# Altium PCB atWork_Motor_Driver.PcbDoc
Units mm, origin at the board's own origin, x right, y up, seen from the top; angles counter-clockwise.
Board outline 145.92 x 74.55 mm, 2 copper layers (Top Layer, Bottom Layer); 39 components, 56 nets, 250 pads, 52 vias.
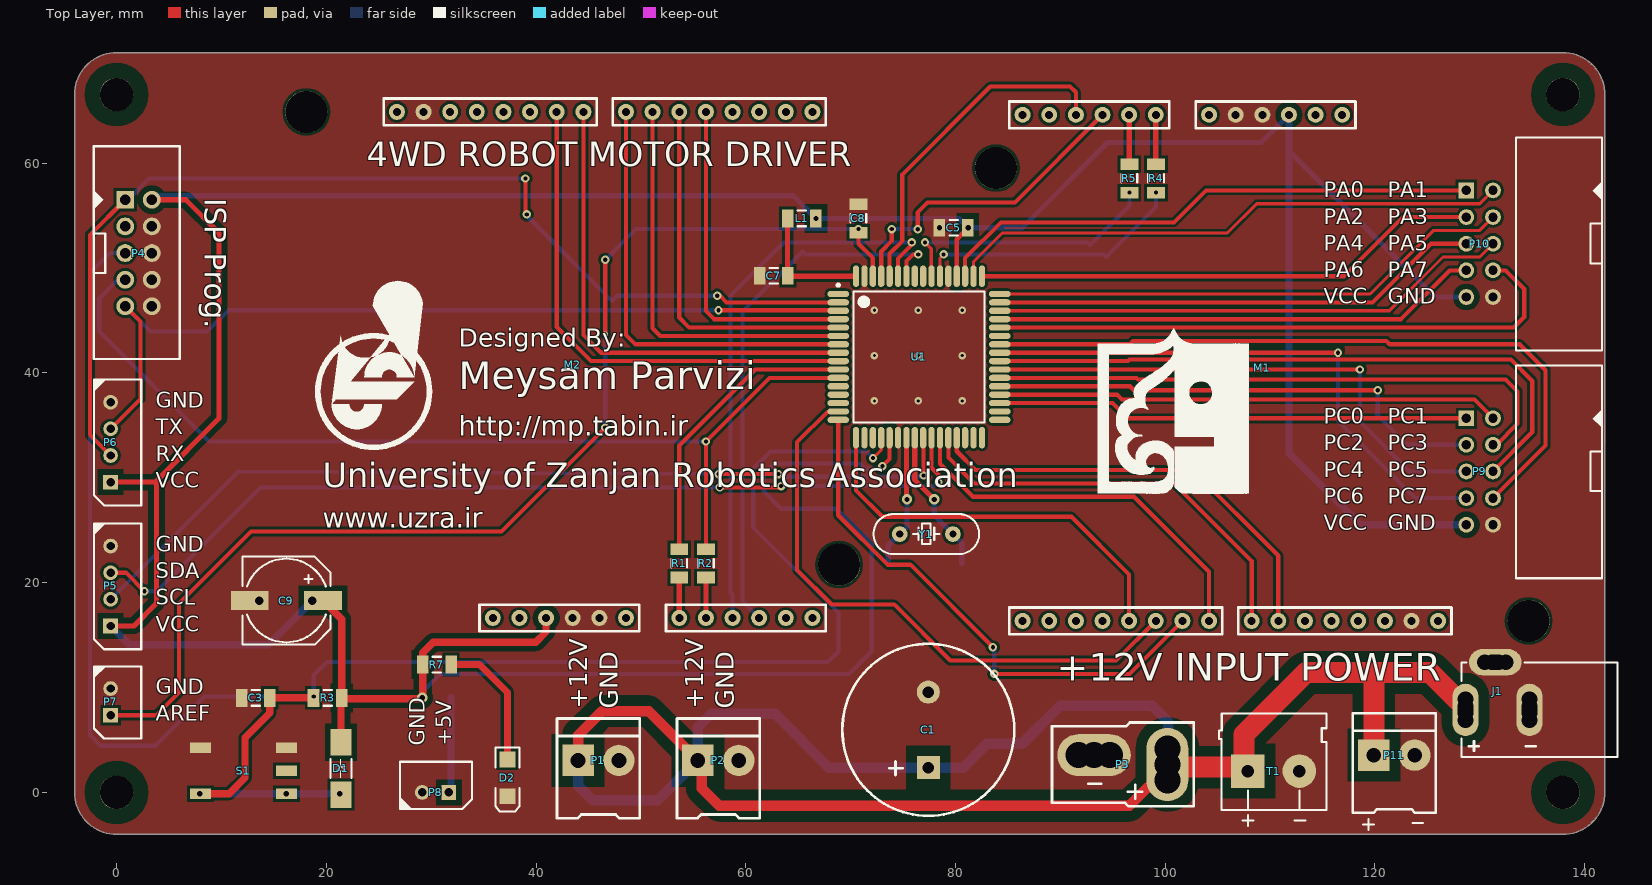
[diagram p0: Top Layer view]
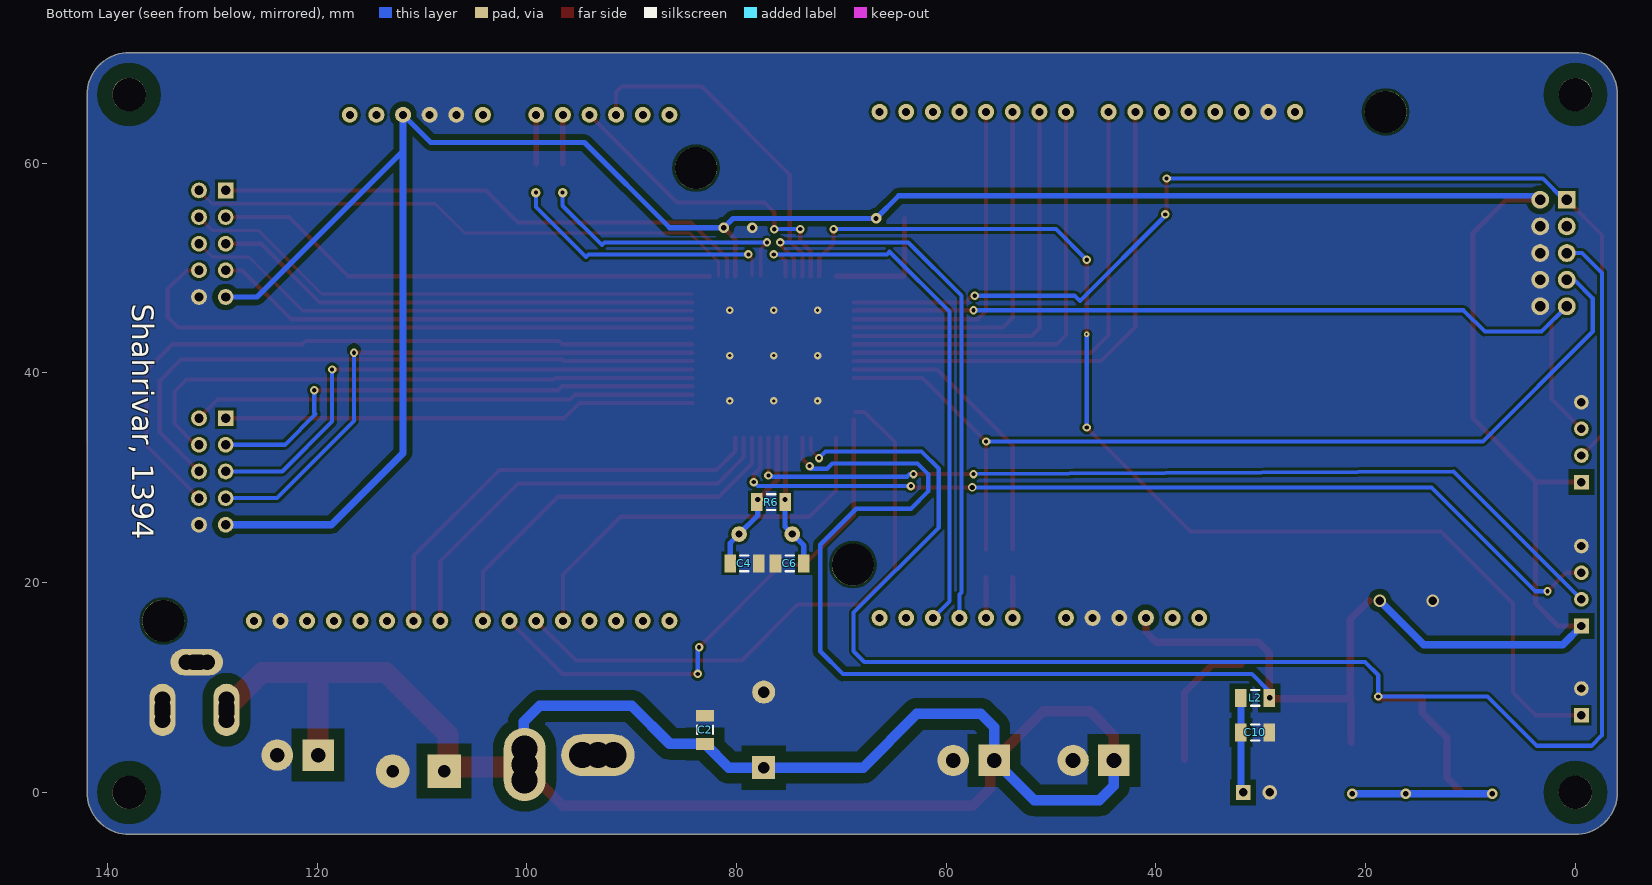
[diagram p1: Bottom Layer view, seen from below]

## Layer stack, top to bottom
Top Solder: solder mask 0.0102, Solder Resist, Dk 3.5
Top Layer: signal copper 0.0356
Dielectric 1: dielectric 0.32, FR-4, Dk 4.8
Bottom Layer: signal copper 0.0356
Bottom Solder: solder mask 0.0102, Solder Resist, Dk 3.5

## Board outline
-4,0 ccw(c0,0) 0,-4 137.923,-4 ccw(c137.923,0) 141.923,0 141.923,66.548 ccw(c137.923,66.548) 137.923,70.548 0,70.548 ccw(c0,66.548) -4,66.548

## Design rules (kind name [scope] priority, off if disabled: settings)
Clearance Clearance_1 [InNet('BATT') vs InNet('GND')] p1: gap=1
Clearance Clearance_2 [InNet('VCC') vs InNet('GND')] p2: gap=0.508
Clearance Clearance_3 [InNet('5V') vs InNet('GND')] p3: gap=0.508
Clearance [All] p4: gap=0.254
PolygonConnect [All] p1: connectstyle=Direct reliefconductorwidth=0.254 reliefentries=4 polygonreliefangle="90 Angle" airgapwidth=0.254
RoutingVias [All] p1: holewidth=0.711 width=1.27 viastyle="Through Hole" minholewidth=0.711 minwidth=1.27 maxholewidth=0.711 maxwidth=1.27
SolderMaskExpansion [All] p1: expansion=0.102
Width [All] p1: maxlimit=2 minlimit=0.254 preferedwidth=0.7 minimp=50.000000 maximp=50.000000 favimp=50.000000
30 further rules are at their usual default settings.

## Components (designator, comment, footprint, x,y, rotation, side; value= is the part's Value field where it differs from the comment)
C1 "Cap Pol1" CAP2 77.407,5.969 r90 top
C2 "Cap" C1206 82.995,5.969 r270 bottom
C3 "Cap" C1206 13.272,9.017 r0 top
C4 "Cap" C1206 79.248,21.844 r0 bottom
C5 "Cap" C1206 79.82,53.848 r0 top
C6 "Cap" C1206 74.93,21.844 r180 bottom
C7 "Cap" C1206 62.675,49.276 r0 top
C8 "Cap" C1206 70.739,54.737 r270 top
C9 "Cap Pol1" CAP-SMD1 16.193,18.288 r0 top
C10 "Cap" C1206 30.544,5.715 r0 bottom
D1 "Diode 1N4007" DIODE-SMD 21.4,2.286 r90 top
D2 "LED2" 3.2X1.6X1.1 37.275,1.397 r270 top
J1 "PWR2.5" PWR2.5 143.129,7.874 r180 top
L1 "Inductor" C1206 65.342,54.737 r0 top
L2 "Inductor" C1206 30.544,9.017 r180 bottom
M1 "MonsterMoto Shield" MONSTERMOTO 134.735,16.434 r180 top
M2 "MonsterMoto Shield" MONSTERMOTO 18.022,64.821 r0 top
P1 "Motor Power" POWER2PIN 44.006,3.048 r0 top
P2 "Motor Power" POWER2PIN 55.436,3.048 r0 top
P3 "XT Power" XT 100.203,2.667 r180 top
P4 "Programmer" BOX2X5 0.826,51.435 r270 top
P5 "I2C" XH4PIN -0.571,15.875 r270 top
P6 "UART" XH4PIN -0.571,29.591 r270 top
P7 "ADC REF" XH2PIN -0.571,7.366 r270 top
P8 "Digital Power" XH2PIN 31.687,0 r0 top
P9 "Box 5X2" BOX2X5_RIGHT 131.255,30.607 r90 top
P10 "Box 5X2" BOX2X5_RIGHT 131.255,52.324 r90 top
P11 "Main Power" POWER2PIN 119.888,3.556 r0 top
R1 "Res1" C1206 53.658,21.844 r270 top
R2 "Res1" C1206 56.198,21.844 r270 top
R3 "Res1" C1206 20.13,9.017 r180 top
R4 "Res1" C1206 99.124,58.547 r90 top
R5 "Res1" C1206 96.584,58.547 r90 top
R6 "Res1" C1206 76.708,27.686 r180 bottom
R7 "Res1" C1206 30.544,12.192 r180 top
S1 "SW-PB" PUSH1 16.193,-0.127 r180 top
T1 "Terminal 2" TERMINAL2PIN 107.887,2.032 r0 top
U1 "ATmega128A-AU" 64A_M 76.518,41.529 r0 top
Y1 "XTAL" XTAL 77.216,24.638 r180 top

## Footprints (in the part's own frame and the unit in brackets; to place one, negate y for a bottom-side part, rotate by r counter-clockwise, add the part's x,y. Pads: shape width x height; smd on the part's side, far side on the other; paste and mask are expansions set on the pad)
3.2X1.6X1.1 [mm] "SMT LED; 2 Flat Leads"
  rect 1.5x1.5 smd: 1(-1.75,0) 2(1.75,0)
  silkscreen extent -2.9,-1.15 3.2,1.15
64A_M [mm] "Thin QFP, 64-Leads, Body 14x14mm, Pitch 0.8mm, IPC Low Density"
  oval 2.05x0.6 smd: 1(-7.7,6) 2(-7.7,5.2) 3(-7.7,4.4) 4(-7.7,3.6) 5(-7.7,2.8) 6(-7.7,2) 7(-7.7,1.2) 8(-7.7,0.4) 9(-7.7,-0.4) 10(-7.7,-1.2) 11(-7.7,-2) 12(-7.7,-2.8) 13(-7.7,-3.6) 14(-7.7,-4.4) 15(-7.7,-5.2) 16(-7.7,-6) 33(7.7,-6) 34(7.7,-5.2) 35(7.7,-4.4) 36(7.7,-3.6) 37(7.7,-2.8) 38(7.7,-2) 39(7.7,-1.2) 40(7.7,-0.4) 41(7.7,0.4) 42(7.7,1.2) 43(7.7,2) 44(7.7,2.8) 45(7.7,3.6) 46(7.7,4.4) 47(7.7,5.2) 48(7.7,6)
  oval 0.6x2.05 smd: 17(-6,-7.7) 18(-5.2,-7.7) 19(-4.4,-7.7) 20(-3.6,-7.7) 21(-2.8,-7.7) 22(-2,-7.7) 23(-1.2,-7.7) 24(-0.4,-7.7) 25(0.4,-7.7) 26(1.2,-7.7) 27(2,-7.7) 28(2.8,-7.7) 29(3.6,-7.7) 30(4.4,-7.7) 31(5.2,-7.7) 32(6,-7.7) 49(6,7.7) 50(5.2,7.7) 51(4.4,7.7) 52(3.6,7.7) 53(2.8,7.7) 54(2,7.7) 55(1.2,7.7) 56(0.4,7.7) 57(-0.4,7.7) 58(-1.2,7.7) 59(-2,7.7) 60(-2.8,7.7) 61(-3.6,7.7) 62(-4.4,7.7) 63(-5.2,7.7) 64(-6,7.7)
  silkscreen extent -7.82,-6.25 6.25,6.97, body extent -7,-7 7,7, height 1.2
BOX2X5 [mm] "Box Header; 5x2 Position"
  rect 1.7x1.7 hole 1: 1(-5.08,0)
  round 1.7 hole 1: 2(-5.08,2.54) 3(-2.54,0) 4(-2.54,2.54) 5(0,0) 6(0,2.54) 7(2.54,0) 8(2.54,2.54) 9(5.08,0) 10(5.08,2.54)
  silkscreen extent -10.18,-3 10.12,5.2, body extent -10.18,-3 10.12,5.2, height 9
BOX2X5_RIGHT [mm] "Box Header; 5x2 Position"
  rect 1.5x1.5 hole 0.9: 1(5.08,2.54)
  round 1.5 hole 0.9: 2(5.08,0) 3(2.54,2.54) 4(2.54,0) 5(0,2.54) 6(0,0) 7(-2.54,2.54) 8(-2.54,0) 9(-5.08,2.54) 10(-5.08,0)
  silkscreen extent -10.18,-10.39 10.12,-2.19, body extent -10.18,-10.39 10.12,-2.19, height 9
C1206 [mm] "Chip Capacitor, Body 3.2x1.6mm, IPC High Density"
  rect 1.1x1.7 smd: 1(-1.35,0) 2(1.35,0)
  silkscreen extent -0.4,-0.75 0.4,0.75, body extent -1.7,-0.9 1.7,0.9, height 1.3
CAP2 [mm] "1000uF, 50V, Electrolyte Capacitor; 2 Leads"
  rect 2.2x2.2 hole 1.1: 1(-3.6,0)
  round 2.2 hole 1.1: 2(3.6,0)
  silkscreen extent -8.2,-8.2 8.2,8.2
CAP-SMD1 [mm] "SMD Electrolyte Capacitor; 2 Leads; 100uF; 25V"
  rect 3.6x1.8 smd: 1(3.5,0) 2(-3.5,0)
  silkscreen extent -4.2,-4.2 4.2,4.2
DIODE-SMD [mm] "1N5822; SS34 Schottkey Diode"
  rect 2.5x2 smd: 1(-2.5,0) 2(2.5,0)
  silkscreen extent -0.9,-0.99 0.9,0.99
MONSTERMOTO [mil] "MonsterMoto Shield"
  round 157.48 hole 157.48: 0(3,3) 0(2003,-1697)
  round 60 hole 30: 0(343,3) 0(543,3) 0(643,3) 0(703,-1897) 0(743,3) 0(803,-1897) 0(843,3) 0(1203,-1897) 0(1603,3) 0(1703,3) 0(1803,3) 0(1803,-1897) 0(1903,3) 0(1903,-1897) 1(903,-1897) 2(443,3) 2(1003,-1897) 2(1103,-1897) 3(1403,-1897) 4(1203,3) 5(1043,3) 6(1403,3) 7(1603,-1897) 8(1503,-1897) 9(1503,3) 10(943,3) 11(1303,3) 12(1703,-1897)
  silkscreen extent 293,-1947 1953,53
POWER2PIN [mm]
  rect 3x3 hole 1.4: 1(0,0)
  round 3 hole 1.4: 2(3.9,0)
  silkscreen extent -2,-5.5 5.9,4
PUSH1 [mm] "SMD Push Button; Arduino Uno Reset Button"
  rect 2x1 smd: 0(0,-2.2) 1(0,0) 1(8.2,0) 2(0,-4.4) 2(8.2,-4.4)
PWR2.5 [mm] "DC Power Jack, 2.5mm, KLD Series, PCB Mount"
  round 1.5 hole 1.5: 1(14.503,-1) 1(14.503,-0.33) 1(14.503,0.33) 1(14.503,1) 2(8.389,-1) 2(8.389,-0.33) 2(8.389,0.33) 2(8.389,1) 3(10.659,-4.547) 3(11.989,-4.547) 3(12.659,-4.547)
  oval 2.5x5 hole 1.5: 1(14.503,0) 2(8.389,0)
  oval 1x1.5 hole 1.5: 3(11.328,-4.547)
  oval 5x2.5 hole 1.5: 3(11.659,-4.547)
  silkscreen extent 0,-4.5 14.88,4.5
TERMINAL2PIN [mm]
  rect 3.2x3.2 hole 1.2: 1(0,0)
  round 3.2 hole 1.2: 2(4.9,0)
  silkscreen extent -2.77,-3.7 7.5,5.5, body extent -2.5,-3.7 7.5,5.5, height 12.4
XH2PIN [mm] "XH 2 Pin Connector"
  rect 1.4x1.4 hole 0.8: 1(0,0)
  round 1.4 hole 0.8: 2(-2.54,0)
  silkscreen extent -4.65,-1.57 2.22,2.93
XH4PIN [mm] "XH 4 Pin Connector"
  rect 1.4x1.4 hole 0.8: 1(0,0)
  round 1.4 hole 0.8: 2(-2.54,0) 3(-5.08,0) 4(-7.62,0)
  silkscreen extent -9.78,-1.57 2.22,2.93
XT [mm] "Li-Po Battery Connector; XT Power Connector"
  round 2.5 hole 2.5: 1(0,1.5) 1(0,0) 1(0,-1.5) 2(5.485,-0.89) 2(6.985,-0.89) 2(8.485,-0.89)
  oval 4x7 hole 2.5: 1(0,0)
  oval 7x4 hole 2.5: 2(6.985,-0.89)
  silkscreen extent -2.5,-4 11,4
XTAL [mm] "Crystal, Thru Hole, 2 Leads"
  round 1.5 hole 0.7: 1(-2.54,0) 2(2.54,0)
  silkscreen extent -5.04,-1.91 5.04,1.91

## Part data
C1 C9: "Polarized Capacitor (Radial)"
C2 C3 C4 C5 C6 C7 C8 C10: "Capacitor"
D1: "1 Amp General Purpose Rectifier"
D2: "Typical RED, GREEN, YELLOW, AMBER GaAs LED"
J1: "Low Voltage Power Supply Connector"
M1 M2: library part MonsterMoto
P1 P2 P3 P7 P8 P11: library part "Header 2", "Header, 2-Pin"
P4: library part "Box 5X2", "Box, 5-Pin, Dual row"
P5 P6: library part "Header 4", "Header, 4-Pin"
P9 P10: "Box, 5-Pin, Dual row"
R1 R2 R3 R4 R5 R6 R7: "Resistor"
S1: "Switch"
T1: "Terminal, 2 pin"
U1: "8-bit AVR Microcontroller, 128KB Flash, 4KB EEPROM, 4KB SRAM, 64-pin TQFP, Industrial Grade (-40°C to 85°C)"
Y1: "Crystal Oscillator"

## Free pads (board coordinates)
  round 3.2 hole 3.2: 0(0,0) 0(0,66.548) 0(137.923,0) 0(137.923,66.548)

## Via types
v1: diameter 0.8, hole 0.4, Top Layer to Bottom Layer, 28 vias
v2: diameter 1, hole 0.5, Top Layer to Bottom Layer, 9 vias
v3: diameter 0.7, hole 0.3, Top Layer to Bottom Layer, 9 vias
v4: diameter 0.9, hole 0.4, Top Layer to Bottom Layer, 2 vias
v5: diameter 1.2, hole 0.8, Top Layer to Bottom Layer, 2 vias
v6: diameter 0.5, hole 0.2, Top Layer to Bottom Layer, 1 vias
v7: diameter 0.8, hole 0.5, Top Layer to Bottom Layer, 1 vias

## Nets (pads, with @x,y where several pads share a name; then routed paths per layer and width w, separated by ;. In a path a pad name is that pad's centre, name@x,y a point inside that pad or via, vN(x,y) a via of type N, cw(c..) or ccw(c..) an arc to the next point about the centre after c; other vN are vias at no path point)
5V: C10.2 L2.1 P8.1 | length 9.1
  Bottom Layer w0.7: P8.1 31.894,0.207 C10.2 L2.1
AREF: C8.2 P7.1 U1.62 | length 109.6
  Top Layer w0.4: P7.1 3.81,7.366 5.969,9.525 5.969,18.034 12.827,24.892 36.703,24.892 v1(46.609,34.798) ; v6(46.609,43.688) v1(46.609,50.8) ; C8.2 70.739,52.324 72.118,50.945 U1.62
  Bottom Layer w0.4: v1(46.609,34.798) v6(46.609,43.688) ; v1(46.609,50.8) 49.53,53.721 v1(70.739,53.721)
BATT: C1.1 C2.2 J1.1 P1.1 P2.1 P3.1 P11.1 T1.1 | length 183.5
  Top Layer w1: P1.1 44.006,5.461 46.292,7.747 50.737,7.747 P2.1 55.817,2.667 55.817,0.381 57.468,-1.27 96.584,-1.27 P3.1@100.267,2.413
  Top Layer w2: P3.1@100.267,2.413 107.506,2.413 107.506,5.525 113.411,11.43 125.247,11.43 J1.1@128.714,7.963 ; P11.1 119.888,11.303
  Bottom Layer w1: P1.1 44.006,0.635 45.403,-0.762 51.626,-0.762 P2.1 55.436,6.223 56.706,7.493 62.802,7.493 67.926,2.369 C1.1 80.745,2.369 C2.2 86.344,4.619 89.98,8.255 98.743,8.255 100.267,6.731 100.267,3.913 P3.1@100.267,2.413
CS1: M1.7 U1.61 | length 30.5
  Top Layer w0.4: U1.61 72.918,51.582 73.914,52.578 v1(73.914,53.721) ; v1(76.391,53.696) 76.391,55.309 77.343,56.261 85.662,56.261 M1.7
  Bottom Layer w0.4: v1(73.914,53.721) 76.366,53.721 v1(76.391,53.696)
CS2: M1.12 U1.60 | length 32.6
  Top Layer w0.4: U1.60 73.718,51.366 74.93,52.578 74.93,58.928 83.312,67.31 90.932,67.31 91.479,66.763 M1.12
CS3: M2.7 U1.59 | length 54
  Top Layer w0.4: U1.59 74.518,50.896 75.819,52.197 v1(75.819,52.451)
  Bottom Layer w0.4: M2.7 58.738,18.86 58.547,19.051 58.547,47.371 63.627,52.451 v1(75.819,52.451)
CS4: M2.12 U1.58 | length 52
  Top Layer w0.4: U1.58 75.318,50.68 75.946,51.308 v1(76.454,51.308)
  Bottom Layer w0.4: M2.12 59.69,18.225 59.69,45.847 65.405,51.562 65.659,51.308 v1(76.454,51.308)
EN1: M1.3 R4.2 | length 4.7
  Top Layer w0.5: R4.2@99.099,59.922 M1.3
EN2: M1.8 R5.2 | length 4.7
  Top Layer w0.5: R5.2@96.559,59.922 M1.8
EN3: M2.3 R1.2 | length 3.9
  Top Layer w0.5: M2.3 R1.2
EN4: M2.8 R2.2 | length 3.9
  Top Layer w0.5: M2.8 R2.2
GND: C1.2 C2.1 C3.1 C4.1 C5.1 C6.1 C7.1 C8.1 C9.2 C10.1 D2.2 J1.2 J1.3 M1.2 M2.2 P1.2 P2.2 P3.2 P4.4 P4.6 P4.8 P4.10 P5.4 P6.4 P7.2 P8.2 P9.10 P10.10 P11.2 S1.2 T1.2 U1.22 U1.53 U1.63
  other v2: 78.486,53.848
  other v3: 72.263,37.338 76.454,37.338 80.645,37.338 72.263,41.656 76.454,41.656 80.645,41.656 72.263,45.974 76.454,45.974 80.645,45.974
  other v5: 13.589,18.288
INA1: M1.4 U1.27 | length 37.1
  Top Layer w0.4: U1.27 78.518,31.337 81.661,28.194 97.028,28.194 104.179,21.043 M1.4
INA2: M1.9 U1.17 | length 38.8
  Top Layer w0.4: U1.17 70.518,28.796 73.025,26.289 91.059,26.289 96.559,20.789 M1.9
INA3: M2.4 U1.7 | length 41.9
  Top Layer w0.4: M2.4 48.578,43.624 49.473,42.729 U1.7
INA4: M2.9 U1.4 | length 31.9
  Top Layer w0.4: M2.9 56.198,45.91 56.979,45.129 U1.4
INB1: M1.5 U1.28 | length 40.6
  Top Layer w0.4: U1.28 79.318,31.934 81.788,29.464 100.838,29.464 108.243,22.059 M1.5
INB2: M1.10 U1.29 | length 42.3
  Top Layer w0.4: U1.29 80.118,32.531 81.915,30.734 102.616,30.734 110.783,22.567 M1.10
INB3: M2.5 U1.8 | length 46.3
  Top Layer w0.4: M2.5 44.514,43.624 46.209,41.929 U1.8
INB4: M2.10 U1.9 | length 48.7
  Top Layer w0.4: M2.10 41.974,44.386 45.231,41.129 U1.9
MISO: U1.13
MOSI: U1.12
NetC4_2: C4.2 R6.1 U1.24 Y1.1 | length 13.8
  Top Layer w0.5: U1.24 76.118,29.8 v2(77.978,27.94)
  Bottom Layer w0.5: v2(77.978,27.94) 77.978,26.416 Y1.1 80.598,23.796 C4.2
NetC6_2: C6.2 R6.2 U1.23 Y1.2 | length 12.4
  Top Layer w0.5: v2@75.318,27.997 v2(75.375,27.94) ; v2@75.318,28.378 U1.23
  Bottom Layer w0.5: C6.2 73.58,23.542 Y1.2 75.375,25.337 v2(75.375,27.94)
NetC7_2: C7.2 L1.1 U1.64 | length 12
  Top Layer w0.5: L1.1 63.992,49.309 C7.2 64.072,49.229 U1.64
NetD2_1: D2.1 R7.1 | length 12.9
  Top Layer w0.7: R7.1 34.608,12.192 37.275,9.525 D2.1
NetR4_1: R4.1 U1.54 | length 25.9
  Top Layer w0.3: U1.54 78.518,50.959 v1(78.867,51.308)
  Bottom Layer w0.4: v1(78.867,51.308) 94.107,51.308 94.361,51.054 99.124,55.817 v4(99.124,57.197)
NetR5_1: R5.1 U1.55 | length 25.9
  Top Layer w0.3: v1(77.089,52.451) 77.682,51.858 77.682,49.265 U1.55
  Bottom Layer w0.4: v1(77.089,52.451) 92.583,52.451 92.837,52.197 96.584,55.944 v4(96.584,57.197)
PA0: P10.1 U1.51 | length 52.2
  Top Layer w0.4: U1.51 80.918,50.946 84.328,54.356 100.838,54.356 103.886,57.404 P10.1
PA1: P10.2 U1.50 | length 53.7
  Top Layer w0.3: U1.50 81.718,50.603 84.455,53.34 105.918,53.34 108.712,56.134 129.985,56.134 P10.2
PA2: P10.3 U1.49 | length 48.5
  Top Layer w0.4: U1.49 117.047,49.229 122.682,54.864 P10.3
PA3: P10.4 U1.48 | length 50.1
  Top Layer w0.3: U1.48 119.538,47.529 125.603,53.594 129.985,53.594 P10.4
PA4: P10.5 U1.47 | length 46.8
  Top Layer w0.4: U1.47 119.754,46.729 125.349,52.324 P10.5
PA5: P10.6 U1.46 | length 49.7
  Top Layer w0.3: U1.46 121.367,45.929 126.492,51.054 129.985,51.054 P10.6
PA6: P10.7 U1.45 | length 46.4
  Top Layer w0.4: U1.45 122.472,45.129 127.127,49.784 P10.7
PA7: P10.8 U1.44 | length 56.8
  Top Layer w0.4: U1.44 133.229,44.329 134.239,45.339 134.239,48.006 132.461,49.784 P10.8
PC0: P9.1 U1.35 | length 45.1
  Top Layer w0.4: U1.35 94.982,37.129 96.424,35.687 P9.1
PC1: P9.2 U1.36 | length 48
  Top Layer w0.4: U1.36 95.417,37.929 95.881,37.465 129.477,37.465 P9.2
PC2: P9.3 U1.37 | length 48.3
  Top Layer w0.4: U1.37 96.653,38.729 97.028,38.354 v1(120.269,38.354)
  Bottom Layer w0.4: v1(120.269,38.354) 120.269,36.207 120.136,36.074 123.063,33.147 P9.3
PC3: P9.4 U1.38 | length 56.2
  Top Layer w0.4: U1.38 97.25,39.529 97.409,39.37 132.461,39.37 133.604,38.227 133.604,35.179 131.572,33.147 P9.4
PC4: P9.5 U1.39 | length 51.4
  Top Layer w0.4: U1.39 v1(118.561,40.329)
  Bottom Layer w0.4: v1(118.561,40.329) 118.561,35.363 123.317,30.607 P9.5
PC5: P9.6 U1.40 | length 61.9
  Top Layer w0.4: U1.40 96.442,41.129 96.588,41.275 132.969,41.275 135.001,39.243 135.001,34.353 P9.6
PC6: P9.7 U1.41 | length 54.1
  Top Layer w0.4: U1.41 v1(116.478,41.929)
  Bottom Layer w0.4: v1(116.478,41.929) 116.478,35.414 123.825,28.067 P9.7
PC7: P9.8 U1.42 | length 67.6
  Top Layer w0.4: U1.42 96.614,42.729 96.938,43.053 121.081,43.053 121.405,42.729 133.801,42.729 136.271,40.259 136.271,33.083 P9.8
PDI: P4.1 P6.2 U1.2 | length 102.8
  Top Layer w0.4: P6.2 -2.54,34.1 -2.54,53.149 P4.1 ; v1(38.989,58.547) 38.989,55.245 v1(39.116,55.118) ; v1(57.277,47.371) 57.531,47.371 58.173,46.729 U1.2
  Bottom Layer w0.4: P4.1 1.08,56.515 3.112,58.547 v1(38.989,58.547) ; v1(39.116,55.118) 39.116,54.991 47.244,46.863 47.752,47.371 v1(57.277,47.371)
PDO: P4.9 P6.3 U1.3 | length 83.3
  Top Layer w0.4: P6.3 2.286,37.528 2.286,44.895 P4.9 ; v1(57.404,45.974) 68.773,45.974 U1.3
  Bottom Layer w0.4: P4.9 3.239,43.942 8.636,43.942 10.668,45.974 v1(57.404,45.974)
PWM1: M1.6 U1.15 | length 56.5
  Top Layer w0.4: U1.15@68.645,36.283 67.781,36.283 64.897,33.399 64.897,21.209 68.199,17.907 74.168,17.907 79.502,12.573 95.314,12.573 M1.6
PWM2: M1.11 U1.16 | length 51.7
  Top Layer w0.4: U1.16 68.818,26.432 73.533,21.717 75.692,21.717 v1(83.566,13.843) ; v1(83.693,11.303) 96.584,11.303 M1.11
  Bottom Layer w0.4: v1(83.566,13.843) 83.693,13.716 v1(83.693,11.303)
PWM3: M2.6 U1.5 | length 35.2
  Top Layer w0.4: M2.6 53.658,45.275 54.604,44.329 U1.5
PWM4: M2.11 U1.6 | length 38.6
  Top Layer w0.4: M2.11 51.118,44.259 51.848,43.529 U1.6
RESET: C3.2 D1.1 P4.5 R3.2 S1.1 U1.20 | length 191.4
  Top Layer w0.3: v1(72.136,31.877) 72.918,32.659 U1.20
  Top Layer w0.7: S1.1@7.993,-0.127 10.732,-0.127 12.256,1.397 12.256,5.207 14.622,7.573 C3.2 R3.2
  Bottom Layer w0.4: P4.5 -0.635,51.435 -2.54,49.53 -2.54,5.461 -1.524,4.445 3.683,4.445 8.382,9.144 v1(18.796,9.144) 18.796,11.176 20.066,12.446 67.818,12.446 68.834,13.462 68.834,17.145 60.706,25.273 60.706,30.861 62.357,32.512 71.501,32.512 v1(72.136,31.877)
  Bottom Layer w0.7: v2(7.938,-0.127) v2(21.273,-0.127)
  other v2: 16.193,-0.127
SCK: P4.7 R2.1 U1.11 | length 94
  Top Layer w0.4: R2.1 v1(56.198,33.465) 62.262,39.529 U1.11
  Bottom Layer w0.4: P4.7 0.127,48.895 -1.651,47.117 -1.651,43.942 8.826,33.465 v1(56.198,33.465)
SCL: P5.2 U1.25 | length 86.2
  Top Layer w0.4: v1(57.404,30.353) v1(63.119,30.353) ; U1.25 76.962,33.785 v1(76.962,30.226)
  Bottom Layer w0.4: P5.2 11.621,30.607 v1(57.404,30.353) ; v1(63.119,30.353) 63.5,30.353 63.754,30.099 v1@76.835,30.099
SDA: P5.3 U1.26 | length 88.5
  Top Layer w0.4: P5.3 0.889,20.955 v1(2.667,19.177) ; v7(57.531,29.083) 63.246,29.083 v1(63.373,29.21) ; U1.26 77.718,30.958 78.359,30.317 v1(78.359,29.591)
  Bottom Layer w0.4: v1(2.667,19.177) 3.81,19.177 13.716,29.083 v7(57.531,29.083) ; v1(63.373,29.21) 77.978,29.21 v1(78.359,29.591)
SS: R1.1 U1.10 | length 28.1
  Top Layer w0.4: R1.1 53.658,33.084 60.903,40.329 U1.10
VCC: C5.2 C9.1 D1.2 L1.2 L2.2 M1.1 M2.1 P4.2 P5.1 P6.1 P9.9 P10.9 R3.1 R7.2 U1.21 U1.52 | length 395
  Top Layer w0.4: v1(73.025,31.115) 73.718,31.808 U1.21 ; U1.52 80.118,52.749 v2(81.217,53.848)
  Top Layer w0.5: P5.1 1.651,15.875 3.81,18.034 3.81,29.591 P6.1 ; P4.2 6.604,56.515 9.779,53.34 9.779,35.687 3.746,29.654
  Top Layer w0.7: C9.1 21.48,16.501 R3.1 ; D1.2 21.4,8.937 v2@29.067,8.937 ; v2@29.194,9.064 R7.2 29.194,13.319 30.21,14.335 39.989,14.335 40.958,15.304 M2.1
  Bottom Layer w0.4: v2(29.147,9.017) 29.147,9.589 30.861,11.303 69.85,11.303 72.009,13.462 72.009,23.622 68.58,27.051 63.373,27.051 61.722,28.702 61.722,30.353 62.738,31.369 70.866,31.369 71.374,30.861 72.863,30.861 v1@73.025,31.023
  Bottom Layer w0.5: P4.2 3.747,56.896 64.533,56.896 v2(66.692,54.737) 80.328,54.737 v2(81.217,53.848) 86.36,53.848 94.488,61.976 109.157,61.976 M1.1 ; 111.906,61.068 125.73,47.244 P10.9
  Bottom Layer w0.7: P5.1 1.207,14.097 14.478,14.097 v5(18.669,18.288) ; M1.1 111.799,32.346 118.618,25.527 P9.9
pads on no net: M1.0 M2.0 P4.3 S1.0 U1.1 U1.14 U1.18 U1.19 U1.30 U1.31 U1.32 U1.33 U1.34 U1.43 U1.56 U1.57

## Polygon pours and split planes (outlines as drawn)
GND on Top Layer "Mechanical 1-No Net" (solid, pour order 2): -4,0 ccw(c0,0) 0,-4 137.923,-4 ccw(c137.923,0) 141.923,0 141.923,66.548 ccw(c137.923,66.548) 137.923,70.548 0,70.548 ccw(c0,66.548) -4,66.548
GND on Bottom Layer "Mechanical 1-No Net" (solid, pour order 4): -4,0 ccw(c0,0) 0,-4 137.923,-4 ccw(c137.923,0) 141.923,0 141.923,66.548 ccw(c137.923,66.548) 137.923,70.548 0,70.548 ccw(c0,66.548) -4,66.548

## Other copper
Top Layer:
  pour cut-out: 0,-3.009 cw(c0,0) -3.009,0 cw(c0,0) 0,3.009 cw(c0,0) 3.009,0 cw(c0,0)
  pour cut-out: 0,63.539 cw(c0,66.548) -3.009,66.548 cw(c0,66.548) 0,69.557 cw(c0,66.548) 3.009,66.548 cw(c0,66.548)
  pour cut-out: 137.923,63.539 cw(c137.923,66.548) 134.914,66.548 cw(c137.923,66.548) 137.923,69.557 cw(c137.923,66.548) 140.932,66.548 cw(c137.923,66.548)
  pour cut-out: 137.923,-3.009 cw(c137.923,0) 134.914,0 cw(c137.923,0) 137.923,3.009 cw(c137.923,0) 140.932,0 cw(c137.923,0)
Bottom Layer:
  pour cut-out: 0,63.539 cw(c0,66.548) -3.009,66.548 cw(c0,66.548) 0,69.557 cw(c0,66.548) 3.009,66.548 cw(c0,66.548)
  pour cut-out: 137.923,63.539 cw(c137.923,66.548) 134.914,66.548 cw(c137.923,66.548) 137.923,69.557 cw(c137.923,66.548) 140.932,66.548 cw(c137.923,66.548)
  pour cut-out: 137.923,-3.009 cw(c137.923,0) 134.914,0 cw(c137.923,0) 137.923,3.009 cw(c137.923,0) 140.932,0 cw(c137.923,0)
  pour cut-out: 0,-3.009 cw(c0,0) -3.009,0 cw(c0,0) 0,3.009 cw(c0,0) 3.009,0 cw(c0,0)

## Silkscreen, mask and mechanical layers (free items; w line width, h text height)
Top Overlay:
  drawing of 2368 lines, arcs and shapes, not listed
  text "4WD ROBOT MOTOR DRIVER" at 23.876,58.928 h4
  text "ISP Prog." at 7.747,56.642 h3.5 r270
  text "PA0" at 115.115,56.261 h2.5
  text "PA1" at 121.211,56.261 h2.5
  text "PA2" at 115.115,53.721 h2.5
  text "PA3" at 121.211,53.721 h2.5
  text "PA4" at 115.115,51.181 h2.5
  text "PA5" at 121.211,51.181 h2.5
  text "PA6" at 115.115,48.641 h2.5
  text "PA7" at 121.211,48.641 h2.5
  text "VCC" at 115.115,46.101 h2.5
  text "GND" at 121.211,46.101 h2.5
  text "Designed By:" at 32.639,41.91 h3
  text "Meysam Parvizi" at 32.639,37.592 h4.5
  text "GND" at 3.736,36.195 h2.5
  text "PC0" at 115.115,34.671 h2.5
  text "PC1" at 121.211,34.671 h2.5
  text "TX" at 3.736,33.655 h2.5
  text "http://mp.tabin.ir" at 32.639,33.401 h3.2
  text "PC2" at 115.115,32.131 h2.5
  text "PC3" at 121.211,32.131 h2.5
  text "RX" at 3.736,31.115 h2.5
  text "PC4" at 115.115,29.591 h2.5
  text "PC5" at 121.211,29.591 h2.5
  text "VCC" at 3.736,28.575 h2.5
  text "University of Zanjan Robotics Association" at 19.685,28.321 h4
  text "PC6" at 115.115,27.051 h2.5
  text "PC7" at 121.211,27.051 h2.5
  text "www.uzra.ir" at 19.685,24.638 h3.2
  text "VCC" at 115.115,24.511 h2.5
  text "GND" at 121.211,24.511 h2.5
  text "GND" at 3.736,22.479 h2.5
  text "SDA" at 3.736,19.939 h2.5
  text "SCL" at 3.736,17.399 h2.5
  text "VCC" at 3.736,14.859 h2.5
  text "+12V INPUT POWER" at 89.662,9.779 h4.5
  text "GND" at 3.736,8.89 h2.5
  text "+12V" at 45.466,8.001 h3 r90
  text "GND" at 48.387,8.001 h3 r90
  text "+12V" at 56.515,8.001 h3 r90
  text "GND" at 59.436,8.001 h3 r90
  text "AREF" at 3.736,6.35 h2.5
  text "GND" at 29.845,4.445 h2.5 r90
  text "+5V" at 32.385,4.445 h2.5 r90
Bottom Overlay:
  text "Shahrivar, 1394" at 138.303,46.609 h3.5 r90
Mechanical 1:
  the board outline again, w0.254